# Altium PCB pagerboardv1.PcbDoc
Units mil, origin at the board's own origin, x right, y up, seen from the top; angles counter-clockwise.
Board outline 1925 x 4100 mil, 2 copper layers (Top Layer, Bottom Layer); 16 components, 16 nets, 87 pads, 9 vias.
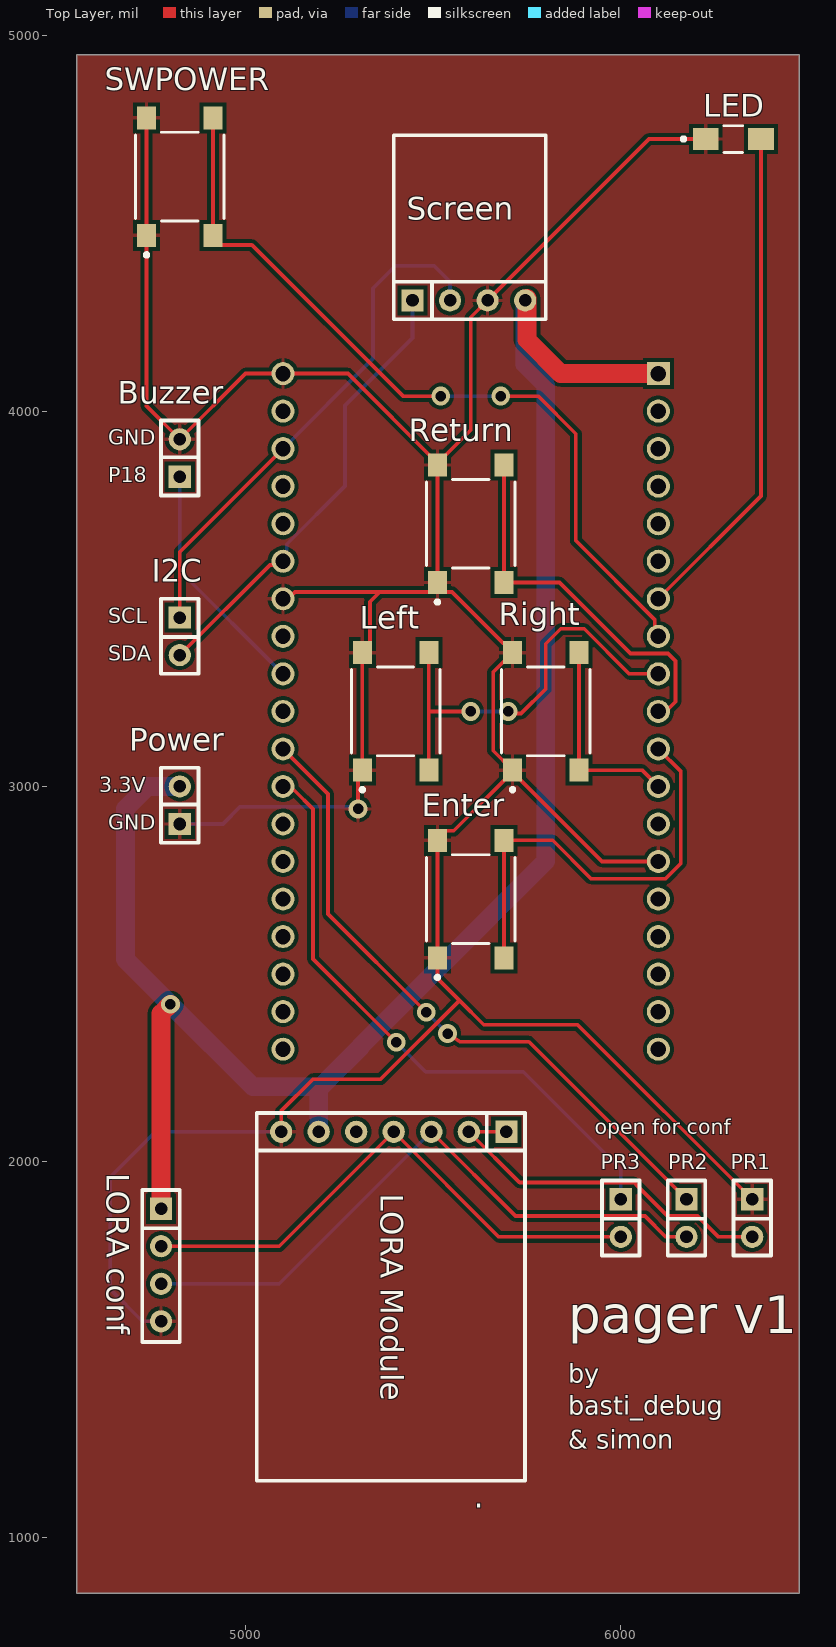
[diagram p0: Top Layer view]
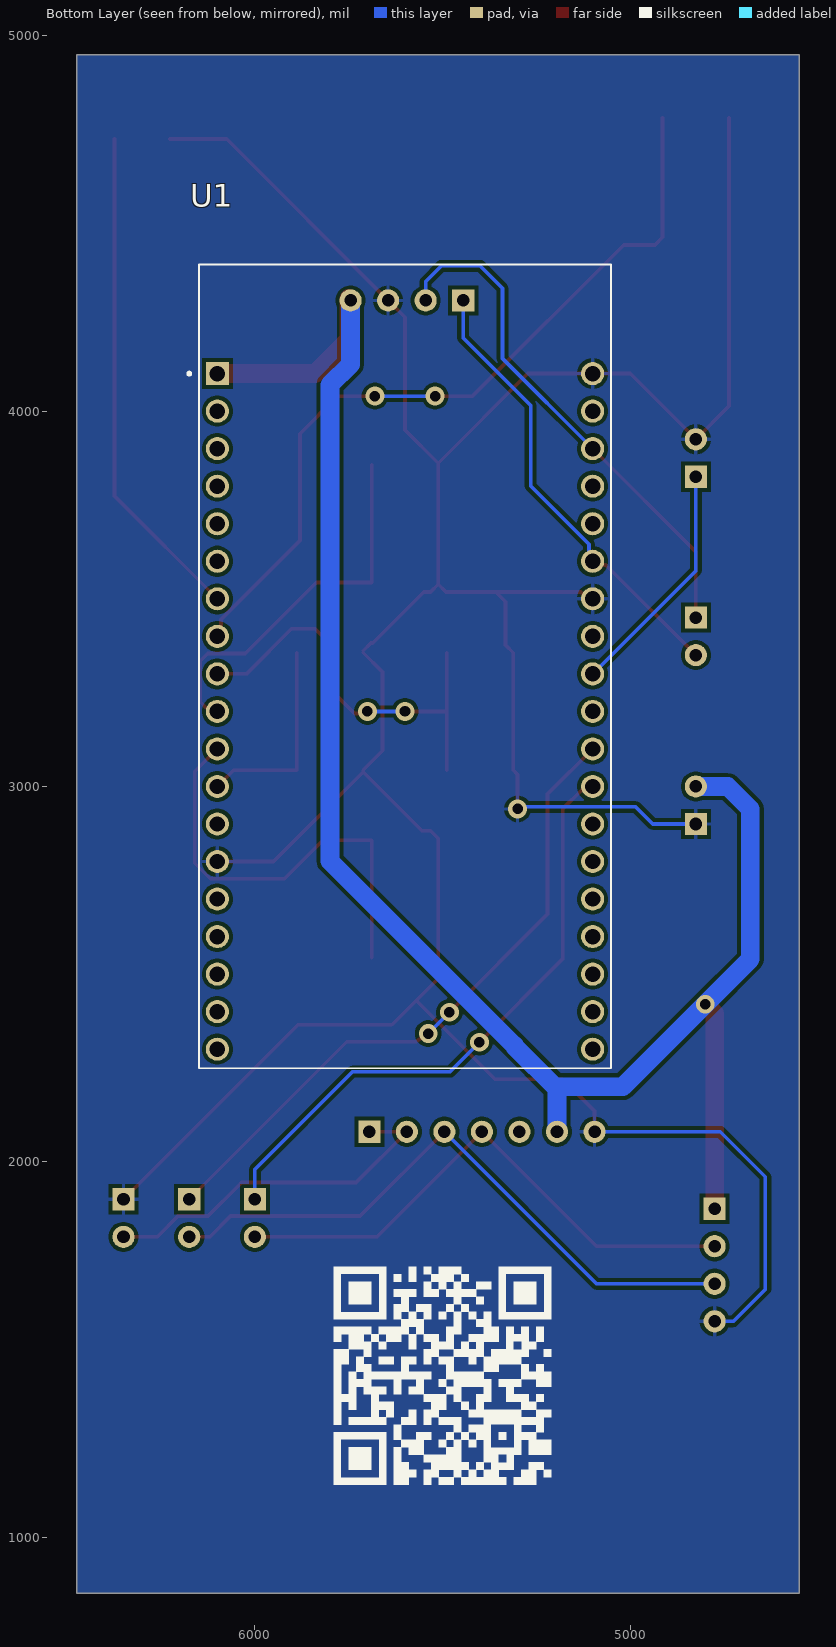
[diagram p1: Bottom Layer view, seen from below]

## Layer stack, top to bottom
Top Solder: solder mask 0.4, Solder Resist, Dk 3.5
Top Layer: signal copper 1.4
Dielectric 1: dielectric 12.6, FR-4, Dk 4.8
Bottom Layer: signal copper 1.4
Bottom Solder: solder mask 0.4, Solder Resist, Dk 3.5

## Board outline
4550,4950 6475,4950 6475,850 4550,850

## Design rules (kind name [scope] priority, off if disabled: settings)
Clearance [All] p1: gap=10 ignorepadtopadclearanceinfootprint=FALSE except(0: Arc-Hole Track-Hole SMDPad-Hole THPad-Hole Via-Hole Fill-Hole Poly-Hole Region-Hole Text-Hole)
PolygonConnect [All] p1: connectstyle=Relief reliefconductorwidth=10 reliefentries=4 polygonreliefangle="90 Angle" airgapwidth=10
RoutingVias [All] p1: holewidth=28 width=50 viastyle="Through Hole" minholewidth=28 minwidth=50 maxholewidth=28 maxwidth=50
SolderMaskExpansion [All] p1: expansion=4 istentingtop=FALSE
Width [All] p1: maxlimit=50 minlimit=10 preferedwidth=50 minimp=50.000000 maximp=50.000000 favimp=50.000000
30 further rules are at their usual default settings.

## Classes and differential pairs
component class pagerv2: 23 . "LORA conf" Power PR1 PR2 PR3
component class pagerv2IO: . Buzzer Enter I2C LED Left Return Right SWPOWER

## Components (designator, comment, footprint, x,y, rotation, side; value= is the part's Value field where it differs from the comment)
. "LORAModule" LORAmodule 5350,2075 r180 top
Buzzer "2pin" 2PIN 4825,3875 r90 top
Enter "PTS645SH50SMTR92LFS" FP-PTS645SH50SMTR92LFS-MFG 5600,2700 r90 top
I2C "2pin" 2PIN 4825,3400 r270 top
LED "APTD3216CGCK" FP-APTD3216CGCK-MFG 6300,4725 r0 top
Left "PTS645SH50SMTR92LFS" FP-PTS645SH50SMTR92LFS-MFG 5400,3200 r90 top
"LORA conf" "LoraPins" 4pin 4780,1720 r270 top (schematic designator *)
Power "2pin" 2PIN 4825,2950 r90 top
PR1 "jumper" jumper 6350,1850 r270 top
PR2 "jumper" jumper 6175,1850 r270 top
PR3 "jumper" jumper 6000,1850 r270 top
Return "PTS645SH50SMTR92LFS" FP-PTS645SH50SMTR92LFS-MFG 5600,3700 r90 top
Right "PTS645SH50SMTR92LFS" FP-PTS645SH50SMTR92LFS-MFG 5800,3200 r90 top
SWPOWER "PTS645SH50SMTR92LFS" FP-PTS645SH50SMTR92LFS-MFG 4825,4625 r90 top
U1 "ESP32-DEVKITC-32D" MODULE_ESP32-DEVKITC-32D 5600,3322.05 r180 bottom
? "Screen" Screen 5600,4300 r0 top

## Footprints (in the part's own frame and the unit in brackets; to place one, negate y for a bottom-side part, rotate by r counter-clockwise, add the part's x,y. Pads: shape width x height; smd on the part's side, far side on the other; paste and mask are expansions set on the pad)
2PIN [mm]
  rect 1.5x1.5 hole 0.85: 1(-1.27,0)
  round 1.5 hole 0.85: 2(1.27,0)
  silkscreen extent -2.54,-1.27 2.54,1.27
4pin [mm]
  rect 1.5x1.5 hole 0.85: 1(-3.937,-0.127)
  round 1.5 hole 0.85: 2(-1.397,-0.127) 3(1.143,-0.127) 4(3.683,-0.127)
  silkscreen extent -5.21,-1.4 5.08,1.14
FP-APTD3216CGCK-MFG [mm]
  rect 1.75x1.5 smd paste+0 mask+0: 1(-1.875,0) 2(1.875,0)
  silkscreen extent -3.5,-0.9 0.63,0.9, body extent -2.85,-1 2.85,1, height 0.25
FP-PTS645SH50SMTR92LFS-MFG [mm]
  rect 1.55x1.3 smd paste+0 mask+0: 1(-3.975,2.25) 2(3.975,2.25) 3(-3.975,-2.25) 4(3.975,-2.25)
  silkscreen extent -5.42,-3 3,3, body extent -4.85,-3.1 4.85,3.1, height 0.25
jumper [mm]
  rect 1.5x1.5 hole 0.85: 1(-1.27,0)
  round 1.5 hole 0.85: 2(1.27,0)
  silkscreen extent -2.54,-1.27 2.54,1.27
LORAmodule [mm]
  round 1.5 hole 0.85: AUX(1.397,-0.127) GND(6.477,-0.127) M1(-6.223,-0.127) RXD(-3.683,-0.127) TXD(-1.143,-0.127) VCC(3.937,-0.127)
  rect 1.5x1.5 hole 0.85: M0(-8.763,-0.127)
  silkscreen extent -10.03,-1.4 8.13,23.49
MODULE_ESP32-DEVKITC-32D [mm]
  rect 1.56x1.56 / inner round 1.56 / far side rect 1.56x1.56 hole 1.04: J2-1(-12.7,19.76)
  round 1.56 hole 1.04: J2-2(-12.7,17.22) J2-3(-12.7,14.68) J2-4(-12.7,12.14) J2-5(-12.7,9.6) J2-6(-12.7,7.06) J2-7(-12.7,4.52) J2-8(-12.7,1.98) J2-9(-12.7,-0.56) J2-10(-12.7,-3.1) J2-11(-12.7,-5.64) J2-12(-12.7,-8.18) J2-13(-12.7,-10.72) J2-14(-12.7,-13.26) J2-15(-12.7,-15.8) J2-16(-12.7,-18.34) J2-17(-12.7,-20.88) J2-18(-12.7,-23.42) J2-19(-12.7,-25.96) J3-1(12.7,19.76) J3-2(12.7,17.22) J3-3(12.7,14.68) J3-4(12.7,12.14) J3-5(12.7,9.6) J3-6(12.7,7.06) J3-7(12.7,4.52) J3-8(12.7,1.98) J3-9(12.7,-0.56) J3-10(12.7,-3.1) J3-11(12.7,-5.64) J3-12(12.7,-8.18) J3-13(12.7,-10.72) J3-14(12.7,-13.26) J3-15(12.7,-15.8) J3-16(12.7,-18.34) J3-17(12.7,-20.88) J3-18(12.7,-23.42) J3-19(12.7,-25.96)
  silkscreen extent -14.7,-27.25 13.95,27.15, body extent -13.97,-24.8 13.97,30.3, height 7.06
Screen [mm]
  round 1.5 hole 0.85: GND(1.143,-0.127) SCL(-1.397,-0.127) VCC(3.683,-0.127)
  rect 1.5x1.5 hole 0.85: SDA(-3.937,-0.127)
  silkscreen extent -5.21,-1.4 5.08,11.05

## Part data
Enter Left Return Right SWPOWER: library part CMP-10040-000028-1, "SWITCH TACTILE SPST-NO 0.05A 12V", Case/Package=SMD/SMT, Color=Black, Current Rating=50mA, Max Operating Temperature=60°C, Max Voltage Rating (DC)=12V, Min Operating Temperature=-20°C, Operating Force=200gf, Package Quantity=1000, Actuator Material=Nylon, Actuator Type=Standard, Contact Material=Bronze, Contact Plating=Silver, Depth=9mm, Illumination Type=Non-Illuminated, Lead Free="Lead Free", Length=6mm, Max Current Rating=50mA, Mechanical Life=100000Cycles, Mount="Surface Mount", Orientation=Straight, Packaging="Tape and Reel", REACH SVHC="No SVHC", Switch Function=Off-Mom, Termination="Gull Wing", Throw Configuration=SPST, Voltage Rating (DC)=12V
LED: library part CMP-2000-05792-2, "LED GREEN CLEAR 2SMD", Case Code (Imperial)=1206, Case Code (Metric)=3216, Color=Green, Forward Current=20mA, Forward Voltage=2.1V, Lens Color=Clear, Max Operating Temperature=85°C, Min Operating Temperature=-40°C, Package Quantity=2000, Case/Package=1206, Dominant Wavelength=570nm, Height=1.8mm, Illumination Color=Green, Lead Free="Lead Free", Length=3.2mm, Lens Style=Clear, Luminous Intensity=300mcd, Mount="Surface Mount", Number of LEDs=1, Number of Pins=2, Packaging="Tape and Reel", Test Current=20mA, Viewing Angle=50°, Width=1.6mm
U1: library part CMP-015-000000-1, "WiFi Development Tools (802.11) ESP32 General Development Kit, ESP32-WROOM-32D on the board", Package=None, Availability="In Stock", Check_prices=https://www.snapeda.com/parts/ESP32-DEVKITC-32D/Espressif+Systems/view-part/?ref=eda, Component Type=Standard, Design Item ID=ESP32-DEVKITC-32D, MF="Espressif Systems", MP=ESP32-DEVKITC-32D, Pin Count=38, Price=None, Purchase-URL=https://pricing.snapeda.com/search/part/ESP32-DEVKITC-32D/?ref=eda, SnapEDA_Link=https://www.snapeda.com/parts/ESP32-DEVKITC-32D/Espressif+Systems/view-part/?ref=snap, Source=ESP32-DEVKITC-32D.SchLib

## Via types
v1: diameter 50, hole 28, Top Layer to Bottom Layer, 9 vias

## Nets (pads, with @x,y where several pads share a name; then routed paths per layer and width w, separated by ;. In a path a pad name is that pad's centre, name@x,y a point inside that pad or via, vN(x,y) a via of type N, cw(c..) or ccw(c..) an arc to the next point about the centre after c; other vN are vias at no path point)
3.3: "LORA conf.1" ..VCC ?.VCC Power.2 U1.J2-1 | length 4768.8
  Top Layer w50: 4775,1875 4775,2395 v1(4800,2420) ; ?.VCC@5750,4300 5750,4190 5840,4100 U1.J2-1
  Bottom Layer w50: Power.2 4740,3000 4680,2940 4680,2540 v1(4800,2420) 5020,2200 5190,2200 5195,2195 ; ..VCC 5195,2195 ; ?.VCC 5745,4125 5800,4070 5800,2801.42 5308.36,2309.78 5308.36,2308.36 5195,2195
GND: "LORA conf.4" ..GND ?.GND Buzzer.2 Enter.1 Enter.2 LED.1 Left.1 Left.2 Power.1 PR1.1 Return.1 Return.2 Right.1 Right.2 SWPOWER.1 SWPOWER.2 U1.J2-14 U1.J3-1 U1.J3-7 | length 9344.7
  Top Layer w10: SWPOWER.2 SWPOWER.1 4736.42,4013.58 Buzzer.2 5000,4100 U1.J3-1 5272.83,4100 Return.2@5511.42,3861.42 ; U1.J3-7 5113.57,3500 5131.57,3517.99 5357.99,3517.99 ; ..GND@5116.28,2087.65 cw(c5106.56,2090) 5110.82,2080.95 5108.8,2080 5106.56,2080 ..GND 5095,2135 5180,2220 5360,2220 5570,2430 ; v1(5300,2940) 5300,3032.09 Left.1 Left.2 5332.01,3377.09 5332.01,3492.01 5357.99,3517.99 ; Right.1 5660,3094.92 5660,3305.08 Right.2 ; Right.2@5711.42,3361.42 5690.83,3382.01 5685.91,3382.01 5549.92,3517.99 5532.01,3517.99 Return.1@5511.42,3538.58 ; U1.J2-14 5950,2800 5711.42,3038.58 5554.84,2882.01 5532.01,2882.01 5511.42,2861.42 Enter.2 Enter.1 5511.42,2488.58 5570,2430 ; LED.1 6075,4725 ?.GND 5600,4250 5600,3950 Return.2@5511.42,3861.42 ; PR1.1 5885,2365 5635,2365 5570,2430 ; 5357.99,3517.99 5490.83,3517.99 Return.1@5511.42,3538.58 ; Return.1@5511.42,3538.58 Return.1 Return.2 Return.2@5511.42,3861.42
  Bottom Layer w10: 4775,1575 4725,1575 4640,1660 4640,1960 4760,2080 ..GND ; Power.1 4940,2900 4985.71,2945.71 5294.29,2945.71 v1(5300,2940)
Net*_2: "LORA conf.2" ..TXD PR3.2 | length 1467.3
  Top Layer w10: 4775,1775 5090,1775 ..TXD 5675,1800 PR3.2
Net*_3: "LORA conf.3" ..RXD PR2.2 | length 1683.7
  Top Layer w10: ..RXD 5719.53,1855.47 6064.53,1855.47 6120,1800 PR2.2
  Bottom Layer w10: 4775,1675 5090,1675 ..RXD
Net._M0: ..M0 ..M1 PR1.2 | length 971.1
  Top Layer w10: ..M0 ..M1 5730.47,1944.53 6035.74,1944.53 6044.53,1935.74 6044.53,1935.47 6124.53,1855.47 6204.53,1855.47 6260,1800 PR1.2
Net_SCL: ?.SCL I2C.1 U1.J3-3 | length 1388.1
  Top Layer w10: I2C.1 4825,3625 U1.J3-3
  Bottom Layer w10: U1.J3-3 5340,4140 5340,4327.35 5400,4387.35 5502.65,4387.35 5545,4345 ?.SCL
Net_SDA: ?.SDA I2C.2 U1.J3-6 | length 1216.5
  Top Layer w10: I2C.2 5065.16,3590.16 5090.16,3590.16 U1.J3-6
  Bottom Layer w10: U1.J3-6 5109.84,3609.84 5109.84,3645.2 5265.16,3800.51 5265.16,4015.16 5445,4195 ?.SDA
NetBuzzer_1: Buzzer.1 U1.J3-9 | length 638.9
  Bottom Layer w10: Buzzer.1 4825,3575 U1.J3-9
NetEnter_3: Enter.3 Enter.4 U1.J2-11 | length 1173.2
  Top Layer w10: Enter.3 Enter.4 5818.5,2856.5 5920.71,2754.29 6118.93,2754.29 6160,2795.36 6160,3040 U1.J2-11
NetLED_2: LED.2 U1.J2-7 | length 1338.4
  Top Layer w10: U1.J2-7 6373.82,3773.82 LED.2
NetLeft_3: Left.3 Left.4 U1.J2-9 | length 1140.4
  Top Layer w10: Left.3 5488.58,3200 ; Left.4 5488.58,3200 ; v1(5600,3200) 5488.58,3200 ; v1(5700,3200) 5705.86,3194.14 5734.14,3194.14 5800,3260 5800,3380 5840,3420 5902.44,3420 6022.44,3300 U1.J2-9
  Bottom Layer w10: v1(5600,3200) v1(5700,3200)
NetPR2_1: PR2.1 U1.J3-11 | length 1757
  Top Layer w10: U1.J3-11 5220,2980 5220,2660 v1(5481.72,2398.28) ; v1(5538.28,2341.72) 5571.46,2320 5579.74,2320 5755,2320 PR2.1
  Bottom Layer w10: v1(5481.72,2398.28) v1(5538.28,2341.72)
NetPR3_1: PR3.1 U1.J3-12 | length 1653.4
  Top Layer w10: U1.J3-12 5109.84,2990.16 5129.84,2990.16 5180,2940 5180,2540 v1(5401.72,2318.28)
  Bottom Layer w10: v1@5401.72,2301.72 v1(5401.72,2318.28) 5480,2240 5740,2240 6000,1980 PR3.1
NetReturn_3: Return.3 Return.4 U1.J2-10 | length 1021.7
  Top Layer w10: Return.4 Return.3 5836.5,3543.5 6025.71,3354.29 6125.71,3354.29 6145.71,3334.29 6145.71,3225.71 6129.84,3209.84 6109.84,3209.84 U1.J2-10
NetRight_3: Right.3 Right.4 U1.J2-12 | length 542.4
  Top Layer w10: Right.4 Right.3 6056.5,3043.5 U1.J2-12
NetSWPOWER_3: SWPOWER.3 SWPOWER.4 U1.J2-8 | length 2132.3
  Top Layer w10: SWPOWER.4 SWPOWER.3 4913.58,4463.58 4934.17,4442.99 5017.01,4442.99 5420,4040 v1(5520,4040) ; v1(5680,4040) 5780,4040 5880,3940 5880,3655.36 6090.16,3445.2 6090.16,3409.84 U1.J2-8
  Bottom Layer w10: v1(5520,4040) v1(5680,4040)
pads on no net: ..AUX U1.J2-2 U1.J2-3 U1.J2-4 U1.J2-5 U1.J2-6 U1.J2-13 U1.J2-15 U1.J2-16 U1.J2-17 U1.J2-18 U1.J2-19 U1.J3-2 U1.J3-4 U1.J3-5 U1.J3-8 U1.J3-10 U1.J3-13 U1.J3-14 U1.J3-15 U1.J3-16 U1.J3-17 U1.J3-18 U1.J3-19

## Polygon pours and split planes (outlines as drawn)
GND on Bottom Layer "GND_L02_P000" (solid, pour order 0): 4550,4950 6475,4950 6475,850 4550,850
GND on Top Layer "GND_L01_P001" (solid, pour order 1): 4550,850 6475,850 6475,4950 4550,4950

## Silkscreen, mask and mechanical layers (free items; w line width, h text height)
Top Overlay:
  text "GND" at 4635,3910 h40
  text "P18" at 4635,3810 h40
  text "SCL" at 4635,3435 h40
  text "SDA" at 4635,3335 h40
  text "3.3V" at 4610,2985 h40
  text "GND" at 4635,2885 h40
  text "open for conf" at 5930,2073.33 h40
  text "pager v1" at 5860,1543.33 h100
  text "by" at 5860,1411.66 h50
  text "basti_debug" at 5860,1326.66 h50
  text "& simon" at 5860,1235 h50
Bottom Overlay:
  drawing of 54 lines, arcs and shapes, not listed

## Text inside footprints (layer, text, board x,y; h text height)
.: Top Overlay "LORA Module" at 5360,1915 h60 r270